# Altium PCB SHARP_GP2AP03VT00F_V0.2_20200112.pcbdoc
Units mil, origin at the board's own origin, x right, y up, seen from the top; angles counter-clockwise.
Board outline 11811.02 x 11811.02 mil, 2 copper layers (Top Layer, Bottom Layer); 16 components, 10 nets, 54 pads, 93 vias.
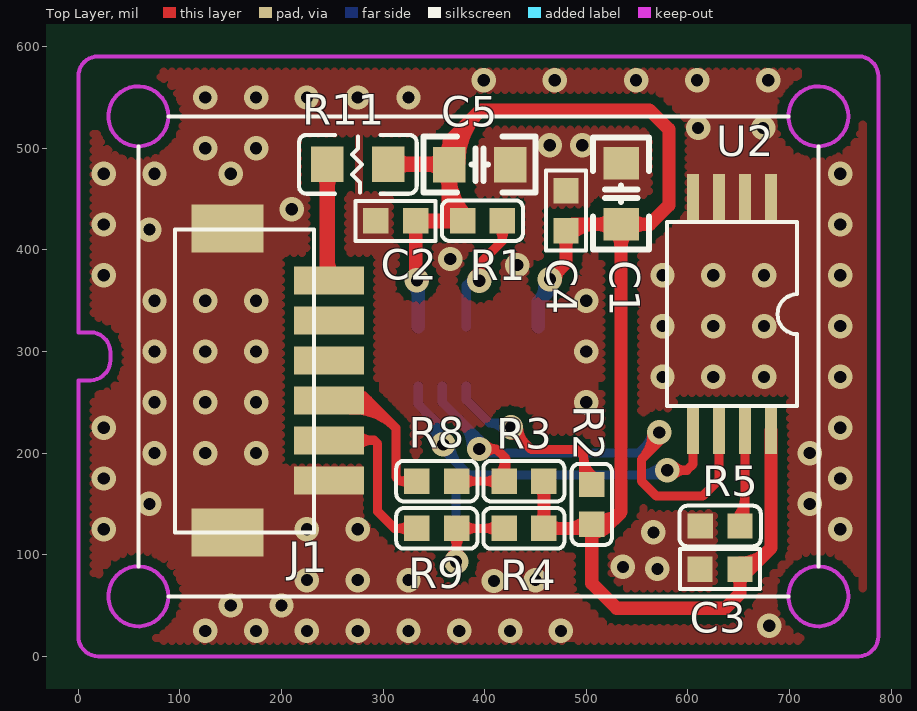
[diagram p0: Top Layer view]
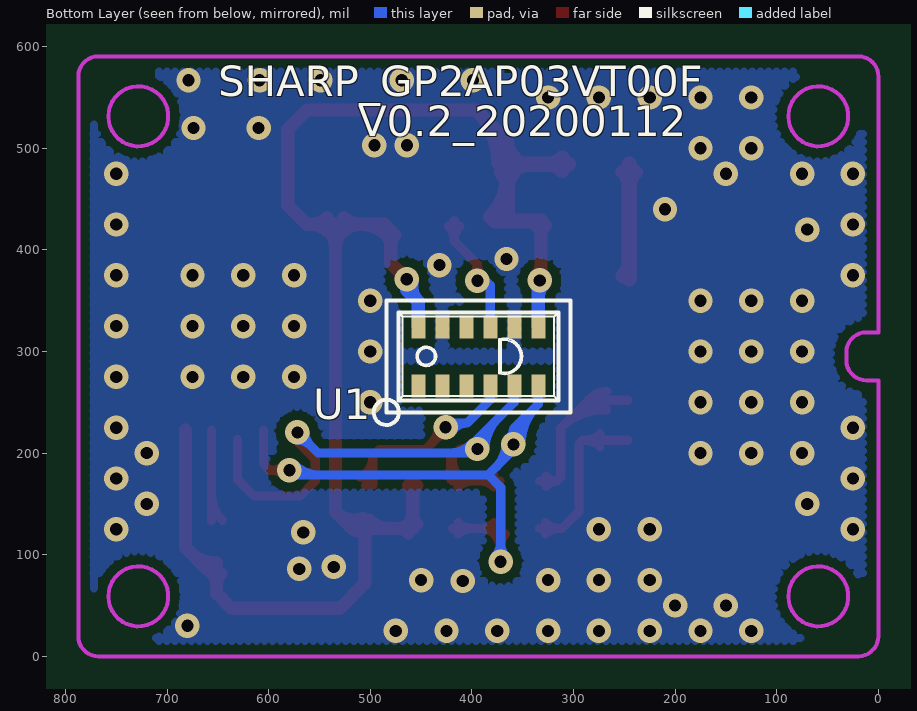
[diagram p1: Bottom Layer view, seen from below]

## Layer stack, top to bottom
Top Layer: signal copper 1.4
Dielectric: dielectric 12.6, FR-4, Dk 4.8
Bottom Layer: signal copper 1.4

## Board outline
-320.85,-155.89 11490.17,-155.89 11490.17,11655.13 -320.85,11655.13

## Design rules (kind name [scope] priority, off if disabled: settings)
Clearance [All] p1: gap=9
ComponentClearance [All] p1 off: gap=10 collisioncheckmode=3 verticalgap=0 showdistances=FALSE
PlaneConnect [All] p1: planeconnectstyle=Direct reliefexpansion=20 reliefentries=4 reliefconductorwidth=10 reliefairgap=10
PolygonConnect [All] p1: connectstyle=Direct reliefconductorwidth=10 reliefentries=4 polygonreliefangle="90 Angle"
RoutingCorners [All] p1: cornerstyle=45-Degree minsetback=20 maxsetback=20
RoutingLayers [All] p1: top layer_v5=FALSE bottom layer_v5=FALSE
RoutingVias [All] p1: holewidth=20 width=32 viastyle="Through Hole" minholewidth=12 minwidth=24 maxholewidth=30 maxwidth=40
SilkscreenOverComponentPads SilkToSolderMaskClearance [IsPad] p1: minsilkscreentomaskgap=10
SolderMaskExpansion [All] p1: expansion=4
Width [All] p1: maxlimit=200 minlimit=1 preferedwidth=10
23 further rules are at their usual default settings.

## Components (designator, comment, footprint, x,y, rotation, side; value= is the part's Value field where it differs from the comment)
C1 "Cap" CAP-CC0603 534.28,455.32 r90 top
C2 "Cap" CAP-CC0402 312.42,428.56 r180 top
C3 "Cap" CAP-CC0402 631.59,85.74 r180 top
C4 "Cap" CAP-CC0402 479.97,438.59 r90 top
C5 "Cap" CAP-CC0603 395.02,483.9 r0 top
J1 "CONNECT" A1001AWV-06 196.85,271.65 r180 top
R1 "RES" RES-RC0402 397.77,428.87 r0 top
R2 "RES" RES-RC0402 505.37,149.49 r90 top
R3 "RES" RES-RC0402 438.64,172.37 r180 top
R4 "RES" RES-RC0402 438.64,125.88 r180 top
R5 "RES" RES-RC0402 631.71,128.26 r180 top
R8 "RES" RES-RC0402 352.88,172.37 r0 top
R9 "RES" RES-RC0402 352.88,125.88 r0 top
R11 "RES" RES-RC0603 275.11,484.24 r0 top
U1 "IC" SHARP_GP2AP03VT00F 393.7,295.28 r180 bottom locked
U2 "IC" TSSOP-8 643.47,336.72 r270 top

## Footprints (in the part's own frame and the unit in brackets; to place one, negate y for a bottom-side part, rotate by r counter-clockwise, add the part's x,y. Pads: shape width x height; smd on the part's side, far side on the other; paste and mask are expansions set on the pad)
A1001AWV-06 [mm]
  rect 1.75x0.7 smd: 1(-1.265,2.5) 2(-1.265,1.5) 3(-1.265,0.5) 4(-1.265,-0.5) 5(-1.265,-1.5) 6(-1.265,-2.5)
  rect 1.8x1.2 smd: 7(1.265,3.8) 8(1.265,-3.8)
  silkscreen extent -0.89,-3.77 2.59,3.8
CAP-CC0402 [mm]
  rrect0% 0.635x0.635 smd: 1(-0.5,0) 2(0.5,0)
  silkscreen extent -1,-0.5 1,0.5
CAP-CC0603 [mil]
  rect 32x35 smd: 1(-30.02,0) 2(30.02,0)
  silkscreen extent -55,-28 55,28
RES-RC0402 [mil]
  rrect0% 25x25 smd: 1(-19.59,0) 2(19.59,0)
  silkscreen extent -40,-20 40,20
RES-RC0603 [mil]
  rect 32x35 smd: 1(-30.02,0) 2(30.02,0)
  silkscreen extent -58,-29 58,29
SHARP_GP2AP03VT00F [mm]
  rect 0.35x0.575 smd: 1(-1.5,-0.738) 2(-0.9,-0.738) 3(-0.3,-0.738) 4(0.3,-0.738) 5(0.9,-0.738) 6(1.5,-0.738) 7(1.5,0.738) 8(0.9,0.738) 9(0.3,0.738) 10(-0.3,0.738) 11(-0.9,0.738) 12(-1.5,0.738)
  silkscreen extent -2.62,-1.72 2.3,1.4
TSSOP-8 [mm]
  rect 1.2x0.3 smd: 1(-2.9,0.975) 2(-2.9,0.325) 3(-2.9,-0.325) 4(-2.9,-0.975) 5(2.9,-0.975) 6(2.9,-0.325) 7(2.9,0.325) 8(2.9,0.975)
  silkscreen extent -2.3,-1.63 2.3,1.63

## Part data
C1 C5: "CAP CER 4.7uF 16V 10% X7R 0603"
C2 C3 C4: "CAP CER 100nF 50V 10% X7R 0402"
J1: library part CON6, "SMT Header 6-Pin 1.0mm white VT"
R1 R2: library part RES2, "RES MF 47K 1/16W 5% 0402"
R3 R4 R5: library part RES2, "RES MF 4.7K 1/16W 5% 0402"
R8 R9 R11: library part RES2, "RES MF 10R 1/16W 5% 0402"
U1: library part GP2AP03VT, "GP2AP03VT"
U2: library part Component_1, "EEPROM,M24C02-WDW6TP,2K,TSSOP-8"

## Via types
v1: diameter 24, hole 12, Top Layer to Bottom Layer, 93 vias

## Nets (pads, with @x,y where several pads share a name; then routed paths per layer and width w, separated by ;. In a path a pad name is that pad's centre, name@x,y a point inside that pad or via, vN(x,y) a via of type N, cw(c..) or ccw(c..) an arc to the next point about the centre after c; other vN are vias at no path point)
+3.3V: J1.6 R11.1 | length 160.9
  Top Layer w15: R11.1@239.08,476.73 cw(c224.57,462.22) 245.09,462.22 cw(c265.61,462.22) R11.1@251.1,476.73 ; J1.6@245.09,371.64 R11.1 ; 245.09,389.01 ccw(c265.59,389.01) J1.6@251.09,374.52
EN: R1.2 U1.9 | length 179
  Top Layer w9: v1@389.72,375.23 ccw(c380.25,386.08) 394.65,386.08 ; v1(394.65,369.58) 394.65,386.08 ; v1@399.58,375.23 cw(c409.05,386.08) 394.65,386.08 ; R1.2@411.71,423.21 cw(c398.05,409.56) 417.36,409.56 cw(c436.68,409.56) R1.2@423.02,423.21 ; R1.2 417.36,408.8 394.65,386.08
  Bottom Layer w9: U1.9 381.89,365.16 386.31,369.58 v1(394.65,369.58)
GND: C1.2 C2.2 C3.2 C4.2 C5.2 J1.1 J1.7 J1.8 R5.2 U1.8 U1.11 U2.1 U2.2 U2.3 U2.4
  other v1: 125,25 175,25 225,25 275,25 325,25 375,25 425,25 475,25 680,30 150,50 200,50 409,74.1 225,75 275,75 325,75 450,75 570,86 536,88 566,122 25,125 225,125 275,125 750,125 70,150 720,150 25,175 750,175 75,200 125,200 175,200 720,200 25,225 750,225 75,250 125,250 175,250 500,250 575,275 625,275 675,275 750,275 75,300 125,300 175,300 500,300 575,325 625,325 675,325 750,325 75,350 125,350 175,350 500,350 25,375 575,375 625,375 675,375 750,375 432,385 366,391 70,420 25,425 750,425 210,440 25,475 75,475 150,475 750,475 125,500 175,500 464,503 496,503 610,520 674,520 125,550 175,550 225,550 275,550 325,550 399,567 469,567 549,567 609,567 679,567
INT: R2.2 U1.4 | length 269.7
  Top Layer w9: v1@425.87,217.97 cw(c425.87,204.47) 435.41,214.02 ; v1(425.87,225.47) 425.87,223.57 446.04,203.39 491.32,203.39 497.26,197.44 ; v1@433.37,225.47 ccw(c456.08,225.47) 440.02,209.41 ; R2.2@497.26,168.61 497.26,197.44 ; 497.26,181.6 ccw(c512.84,181.6) R2.2@504.86,168.22 ; R2.2@509.47,175.95 cw(c522.29,197.44) 497.26,197.44
  Bottom Layer w9: U1.4 381.89,252.54 404.88,229.56 ; v1@419.52,221.47 ccw(c404.88,212.25) 404.88,229.56 ; v1(425.87,225.47) 421.78,229.56 404.88,229.56
M+3.3V: C1.1 C2.1 C3.1 C4.1 C5.1 R1.1 R2.1 R3.1 R4.1 R11.2 U1.7 U1.12 U2.8 | length 2378.6
  Top Layer w13: C2.1@327.86,424.31 cw(c317.62,414.07) 332.1,414.07 cw(c346.59,414.07) C2.1@336.34,424.31 ; 332.1,385.94 ccw(c349.2,385.94) v1@337.11,373.85 ; C2.1 332.1,371.08 v1(333.22,369.96) ; C5.1@358.63,492.45 ccw(c345.69,506.78) 365,506.78 ; C5.1@361.5,485.38 cw(c404.16,485.61) 373.99,515.77 ; C5.1@364.66,484.24 C5.1 365,506.78 ; C5.1@371.37,492.45 cw(c384.31,506.78) 365,506.78 ; C5.1@374.5,485.45 cw(c447.97,485.85) 396.02,537.8 ; R1.1@377.87,428.56 R1.1 ; R4.1@453.99,130.12 ccw(c443.75,140.37) 458.23,140.37 ccw(c472.72,140.37) 462.47,130.12 ccw(c472.72,140.37) 472.72,125.88 ccw(c472.72,111.4) R4.1@462.47,121.64 ; R3.1@453.99,168.13 cw(c443.75,157.89) 458.23,157.89 cw(c472.72,157.89) R3.1@462.47,168.13 ; R3.1 R4.1 R2.1@505.37,125.88 ; v1(464.15,371.11) 479.97,386.93 C4.1 486.37,425.3 C1.1 ; v1@464.15,376.61 ccw(c464.15,389.89) 473.54,380.5 ccw(c482.93,371.11) v1@469.65,371.11 ; C4.1@475.73,414.66 cw(c465.48,404.42) 479.97,404.42 cw(c494.45,404.42) 484.21,414.66 cw(c509.9,388.97) 509.9,425.3 ; 481.19,125.88 ccw(c481.19,154.08) R2.1@501.13,134.14 ; R2.1@501.13,125.65 cw(c490.88,115.41) 505.37,115.41 cw(c519.86,115.41) R2.1@509.61,125.65 ; R2.1@503.17,123.25 ccw(c508.13,138.22) 519.28,127.07 ; R2.1 R2.1@505.37,125.88 ; R2.1@507.26,135.59 ccw(c515.54,160.62) 534.18,141.98 ; R2.1@511.2,131.3 ccw(c518.09,132.96) 518.09,125.88 ; C1.1@526.07,418.59 ccw(c509.85,402.37) 509.85,425.3 ccw(c509.85,448.24) C1.1@526.07,432.02 ; C1.1@527.57,418.59 cw(c511.59,402.61) 534.18,402.61 ; 534.19,402.13 cw(c557.46,402.13) C1.1@541,418.59 ; C1.1@542.5,418.59 cw(c558.72,402.37) 558.72,425.3 cw(c558.72,448.24) C1.1@542.5,432.02 ; C3.1@647.03,81.5 cw(c636.79,71.25) 651.28,71.25 cw(c665.76,71.25) C3.1@655.52,81.5 ; C3.1@651.28,91.74 ccw(c651.28,129.38) 677.89,102.76 ; U2.8 681.86,106.73 660.87,85.74 C3.1 651.28,61.83 636.77,47.32 529.77,47.32 505.37,71.72 R2.1@505.37,125.88 ; 365,506.78 396.02,537.8 ; 396.02,537.8 562.17,537.8 581.24,518.72 581.24,444 562.55,425.3 C1.1 ; R2.1@505.37,125.88 518.09,125.88 ; 518.09,125.88 534.18,141.98 534.18,425.2 C1.1
  Top Layer w15: R11.2 C5.1@364.66,484.24 ; R11.2@311.14,478.23 cw(c325.65,463.72) 325.65,484.24 cw(c325.65,504.76) R11.2@311.14,490.25 ; C2.1 R1.1@377.87,428.56 ; 343.65,484.24 cw(c343.65,462.55) C5.1@358.99,477.89 ; 345.31,484.24 ccw(c345.31,503.59) C5.1@358.99,489.91 ; C5.1@358.99,476.39 cw(c344.48,461.88) 365,461.88 cw(c385.52,461.88) C5.1@371.01,476.39 ; 365,431.32 C5.1 ; C5.1@365,472.76 ccw(c422.07,472.76) R1.1@381.72,432.41 ; 365.35,428.56 ccw(c365.35,441.7) R1.1@374.65,432.41
  Bottom Layer w13: v1@329.33,366.08 cw(c316.5,353.25) 334.65,353.25 ; v1(333.22,369.96) 334.65,368.54 U1.7 ; U1.12 452.76,349.11 ; v1@458.78,369.9 cw(c436.89,364.98) 452.76,349.11 ; v1(464.15,371.11) 464.15,360.5 452.76,349.11
NetJ1_2: J1.2 R9.1 | length 227.2
  Top Layer w9: J1.2 291.18,212.6 294.6,209.18 294.6,142.48 311.2,125.88 R9.1 ; J1.2@273.88,206.04 cw(c289.73,190.2) 289.73,212.6 cw(c289.73,235) J1.2@273.88,219.16 ; R9.1@327.63,120.23 ccw(c313.98,106.57) 313.98,125.88 ccw(c313.98,145.2) R9.1@327.63,131.54
NetJ1_3: J1.3 R8.1 | length 297.5
  Top Layer w9: J1.3 285.43,251.97 ; J1.3@267.07,260.69 cw(c267.7,238.94) 283.08,254.32 ; J1.3@267.33,251.69 cw(c268.52,210.24) 297.84,239.56 ; J1.3@267.59,242.69 cw(c269.35,181.55) 312.6,224.8 ; J1.3@274.85,246.55 cw(c285.43,238.94) 285.43,251.97 ; J1.3@274.85,257.39 ccw(c285.43,265) 285.43,251.97 ; R8.1@327.03,167.4 ccw(c316.72,159.21) 316.72,172.37 ; R8.1@327.03,177.35 cw(c316.72,185.53) 316.72,172.37 ; R8.1 316.72,172.37 ; 285.43,251.97 312.6,224.8 ; 312.6,224.8 312.6,176.49 316.72,172.37
NetR5_1: R5.1 U2.7 | length 117.8
  Top Layer w9: R5.1@645.65,133.92 ccw(c620,159.56) 656.27,159.56 ; R5.1@656.27,133.23 U2.7
SCL: R3.2 R8.2 U1.5 U2.6 | length 866.9
  Top Layer w9: R8.2 R3.2 ; R8.2@378.13,166.72 cw(c391.79,153.06) 391.79,172.37 cw(c391.79,191.69) R8.2@378.13,178.03 ; v1@398.65,199.97 v1(394.57,204.06) 411.22,204.06 ; v1@400.18,199.08 cw(c411.22,189.32) 411.22,204.06 ; v1@400.18,209.03 ccw(c411.22,218.79) 411.22,204.06 ; R3.2@413.39,166.72 ccw(c399.74,153.06) 399.74,172.37 ccw(c399.74,191.69) 413.39,178.03 ccw(c399.74,191.69) 419.05,191.69 ccw(c438.36,191.69) 424.71,178.03 cw(c433.89,187.21) 420.91,187.21 ; R3.2@413.73,178.34 ccw(c399.43,194.37) 420.91,194.37 ; v1@564.32,220.04 cw(c529.61,218.25) 554.19,193.67 ; 568.5,207.98 ccw(c556.82,219.66) v1@573.31,220.51 ; v1(571.81,220.43) 571.81,211.3 554.18,193.67 ; U2.6@630.68,213.27 630.68,173.97 614.31,157.61 569.12,157.61 554.18,172.55 554.18,193.67 ; 411.22,204.06 419.05,196.23 ; R3.2 420.91,174.23 420.91,194.37 ; R3.2 419.05,196.23 ; 419.05,196.23 420.91,194.37
  Bottom Layer w9: U1.5 358.27,250.08 394.57,213.78 v1(394.57,204.06) 398.65,199.97 551.35,199.97 v1(571.81,220.43) ; 374.89,233.46 cw(c345.48,204.06) v1@387.07,204.06 ; 390.25,218.09 cw(c376.21,204.06) v1@396.07,204.06 ; v1@399.87,209.36 ccw(c422.53,232.02) 422.53,199.97 ; v1@564.31,220.43 cw(c546.2,220.43) 559.01,207.63 cw(c571.81,194.82) v1@571.81,212.93
SDA: R4.2 R9.2 U1.6 U2.5 | length 843.4
  Top Layer w9: v1@366.49,98.32 ccw(c352.05,112.76) 372.47,112.76 ; R9.2@366.82,120.23 cw(c353.16,106.57) 372.47,106.57 cw(c391.79,106.57) 378.13,120.23 cw(c391.79,106.57) 391.79,125.88 cw(c391.79,145.2) R9.2@378.13,131.54 ; v1(371.8,93.02) 372.47,93.7 R9.2 R4.2 ; 372.47,109.49 ccw(c388.27,109.49) v1@377.1,98.32 ; R4.2@413.39,120.23 ccw(c399.74,106.57) 399.74,125.88 ccw(c399.74,145.2) R4.2@413.39,131.54 ; v1(579.68,183.11) 598.93,183.11 605.09,189.27 U2.5 ; v1@584.99,177.81 cw(c597.79,165) 597.79,183.11 cw(c597.79,201.22) v1@584.99,188.41
  Bottom Layer w9: U1.6 334.65,248.24 359.17,223.72 ; 335.64,247.25 cw(c296.93,208.54) v1@351.67,208.54 ; 351,231.89 cw(c327.66,208.54) v1@360.67,208.54 ; v1@354.62,214.5 ccw(c347.57,223.72) 359.17,223.72 ; v1@363.73,214.5 cw(c370.77,223.72) 359.17,223.72 ; v1@366.49,98.32 ccw(c354.08,110.74) 371.63,110.74 ; v1@366.67,208.54 ccw(c397.23,208.54) 375.62,186.94 ; v1@371.63,103.94 371.63,166.18 384,178.56 ; 371.63,111.52 ccw(c390.29,111.52) v1@377.1,98.32 ; 550.58,178.56 ccw(c550.58,212.21) v1@574.38,188.41 ; v1(579.68,183.11) 575.13,178.56 384,178.56 ; 359.17,223.72 v1(359.17,208.54) 359.17,203.39 384,178.56
pads on no net: J1.4 J1.5 U1.1 U1.2 U1.3 U1.10

## Polygon pours and split planes (outlines as drawn)
GND on Top Layer "Top Layer-GND" (hatched 90Degree grid 8 track 8, remove dead copper, pour order 4): 0,0 787.4,0 787.4,590.55 0,590.55
GND on Bottom Layer "Bottom Layer-GND" (hatched 90Degree grid 8 track 8, remove dead copper, pour order 6): 0,0 787.4,0 787.4,590.55 0,590.55

## Keep-outs
Keep-Out Layer:
  circle w3.94: c59.05,59.04 r29.53
  circle w3.94: c728.35,59.04 r29.53
  circle w3.94: c59.05,531.48 r29.53
  circle w3.94: c728.35,531.48 r29.53
  lines w3.94: 0,19.67 ccw(c19.68,19.67) 19.68,-0.02 767.72,-0.02 ccw(c767.72,19.67) 787.4,19.67 787.4,570.85 ccw(c767.72,570.85) 767.72,590.54 19.68,590.54 ccw(c19.68,570.85) 0,570.85 0,318.88 11.81,318.88 cw(c11.81,299.2) 31.5,299.2 31.5,291.32 cw(c11.81,291.32) 11.81,271.64 0,271.64 0,19.67

## Silkscreen, mask and mechanical layers (free items; w line width, h text height)
Top Overlay:
  lines w3.94: 59.06,88.58 59.06,501.97 ; 88.58,59.06 698.82,59.06 ; 88.58,531.5 698.82,531.5 ; 728.35,88.58 728.35,501.97
Bottom Overlay:
  circle w1.97: c444.88,295.26 r8.12
  circle w1.97: c444.88,295.26 r9.84
  lines w1.97: 314.96,251.95 314.96,338.57 ; 314.96,251.95 319.09,256.09 ; 314.96,251.95 472.44,251.95 ; 314.96,338.57 472.44,338.57 ; 314.96,338.57 319.09,334.43 ; 319.09,256.09 319.09,334.43 ; 319.09,256.09 468.31,256.09 ; 319.09,334.43 468.31,334.43 ; 371.51,279.63 cw(c368.11,295.26) 371.51,310.89 ; 371.51,279.63 ccw(c406.48,323.09) 373.23,278.3 ; 371.51,279.63 371.51,310.89 ; 371.51,310.89 cw(c406.48,267.43) 373.23,312.22 ; 373.23,278.3 cw(c368.11,295.26) 373.23,312.22 ; 373.23,278.3 373.23,312.22 ; 468.31,256.09 472.44,251.95 ; 468.31,256.09 468.31,334.43 ; 468.31,334.43 472.44,338.57 ; 472.44,251.95 472.44,338.57
  text "SHARP_GP2AP03VT00F" at 649.61,551.18 h30
  text "V0.2_20200112" at 511.81,511.81 h30
Mechanical 1:
  circle w3.94: c728.35,531.48 r29.53
  circle w3.94: c59.05,531.48 r29.53
  circle w3.94: c728.35,59.04 r29.53
  circle w3.94: c59.05,59.04 r29.53
  lines w3.94: 0,19.67 ccw(c19.68,19.67) 19.68,-0.02 767.72,-0.02 ccw(c767.72,19.67) 787.4,19.67 787.4,570.85 ccw(c767.72,570.85) 767.72,590.54 19.68,590.54 ccw(c19.68,570.85) 0,570.85 0,318.88 11.81,318.88 cw(c11.81,299.2) 31.5,299.2 31.5,291.32 cw(c11.81,291.32) 11.81,271.64 0,271.64 0,19.67